# Altium PCB Speedometer_Tech.PcbDoc (part 1 of 4)
Units mm, origin at the board's own origin, x right, y up, seen from the top; angles counter-clockwise.
Board outline 309.2 x 103.7 mm, 4 copper layers (Top Layer, MidLayer1, MidLayer2, Bottom Layer), stack 0.603 mm thick; 246 components, 310 nets, 1253 pads, 701 vias.
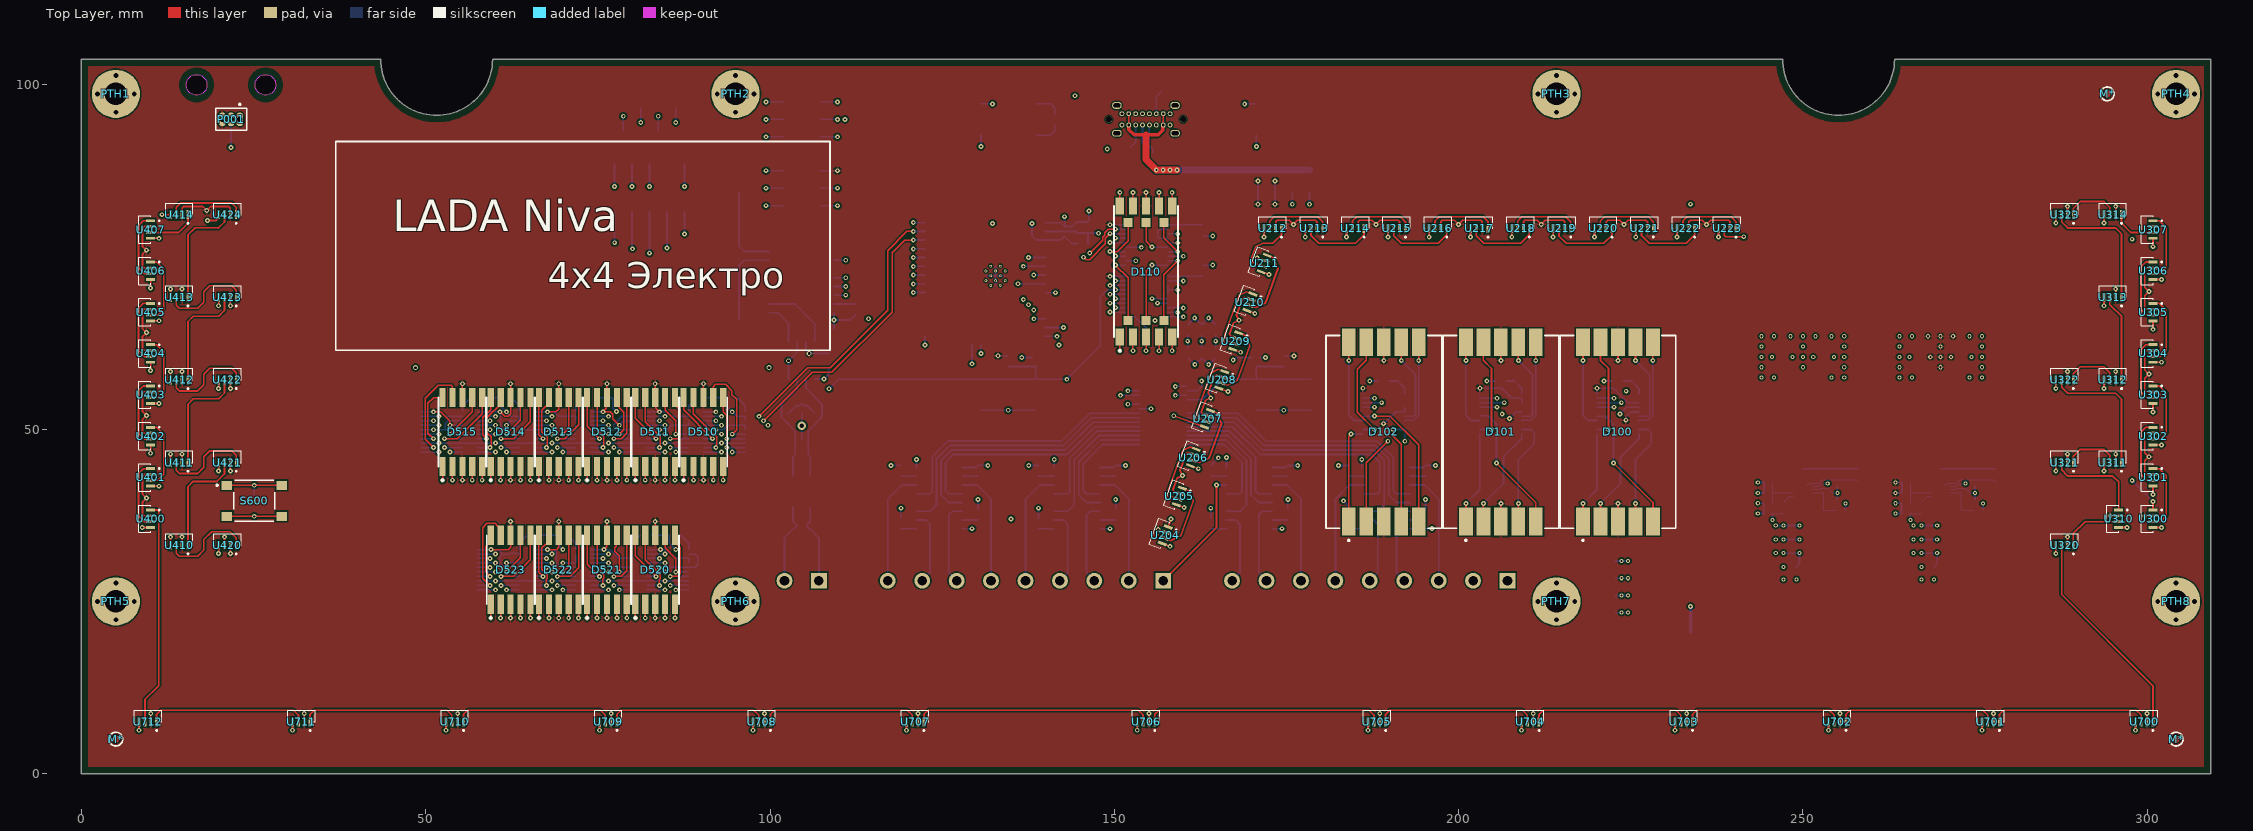
[diagram p0: Top Layer view]
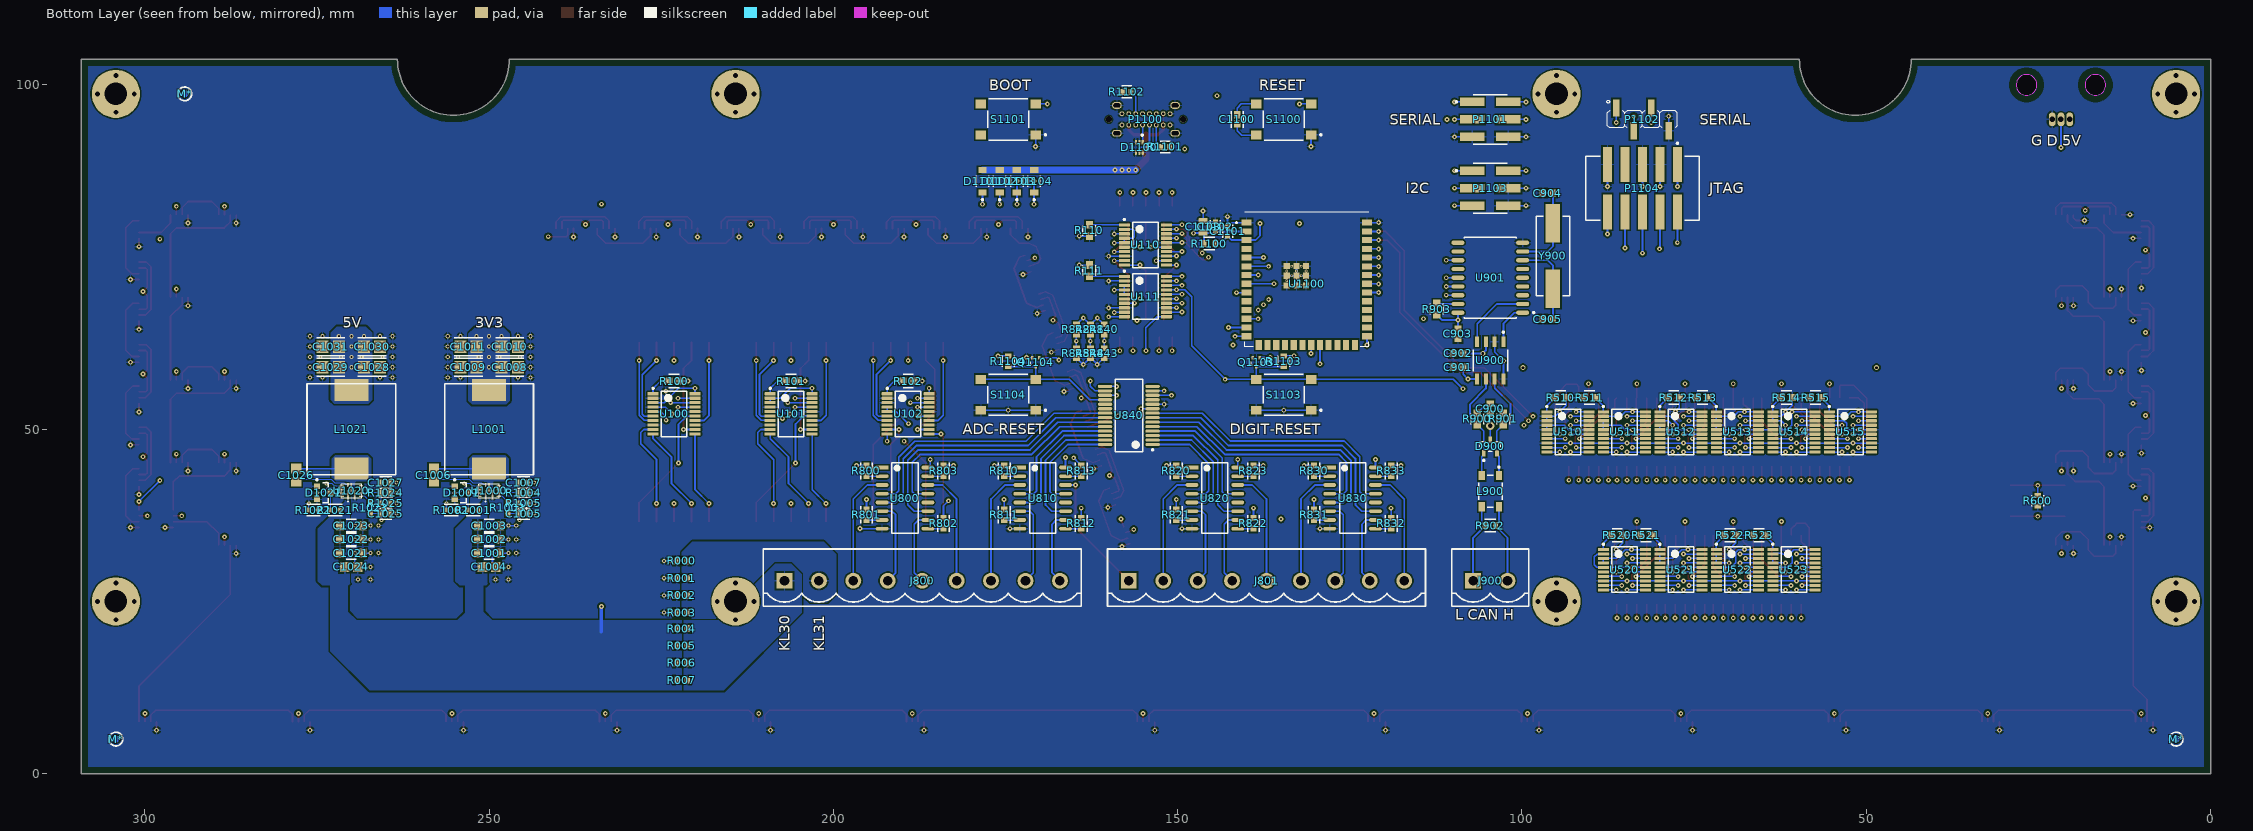
[diagram p1: Bottom Layer view, seen from below]
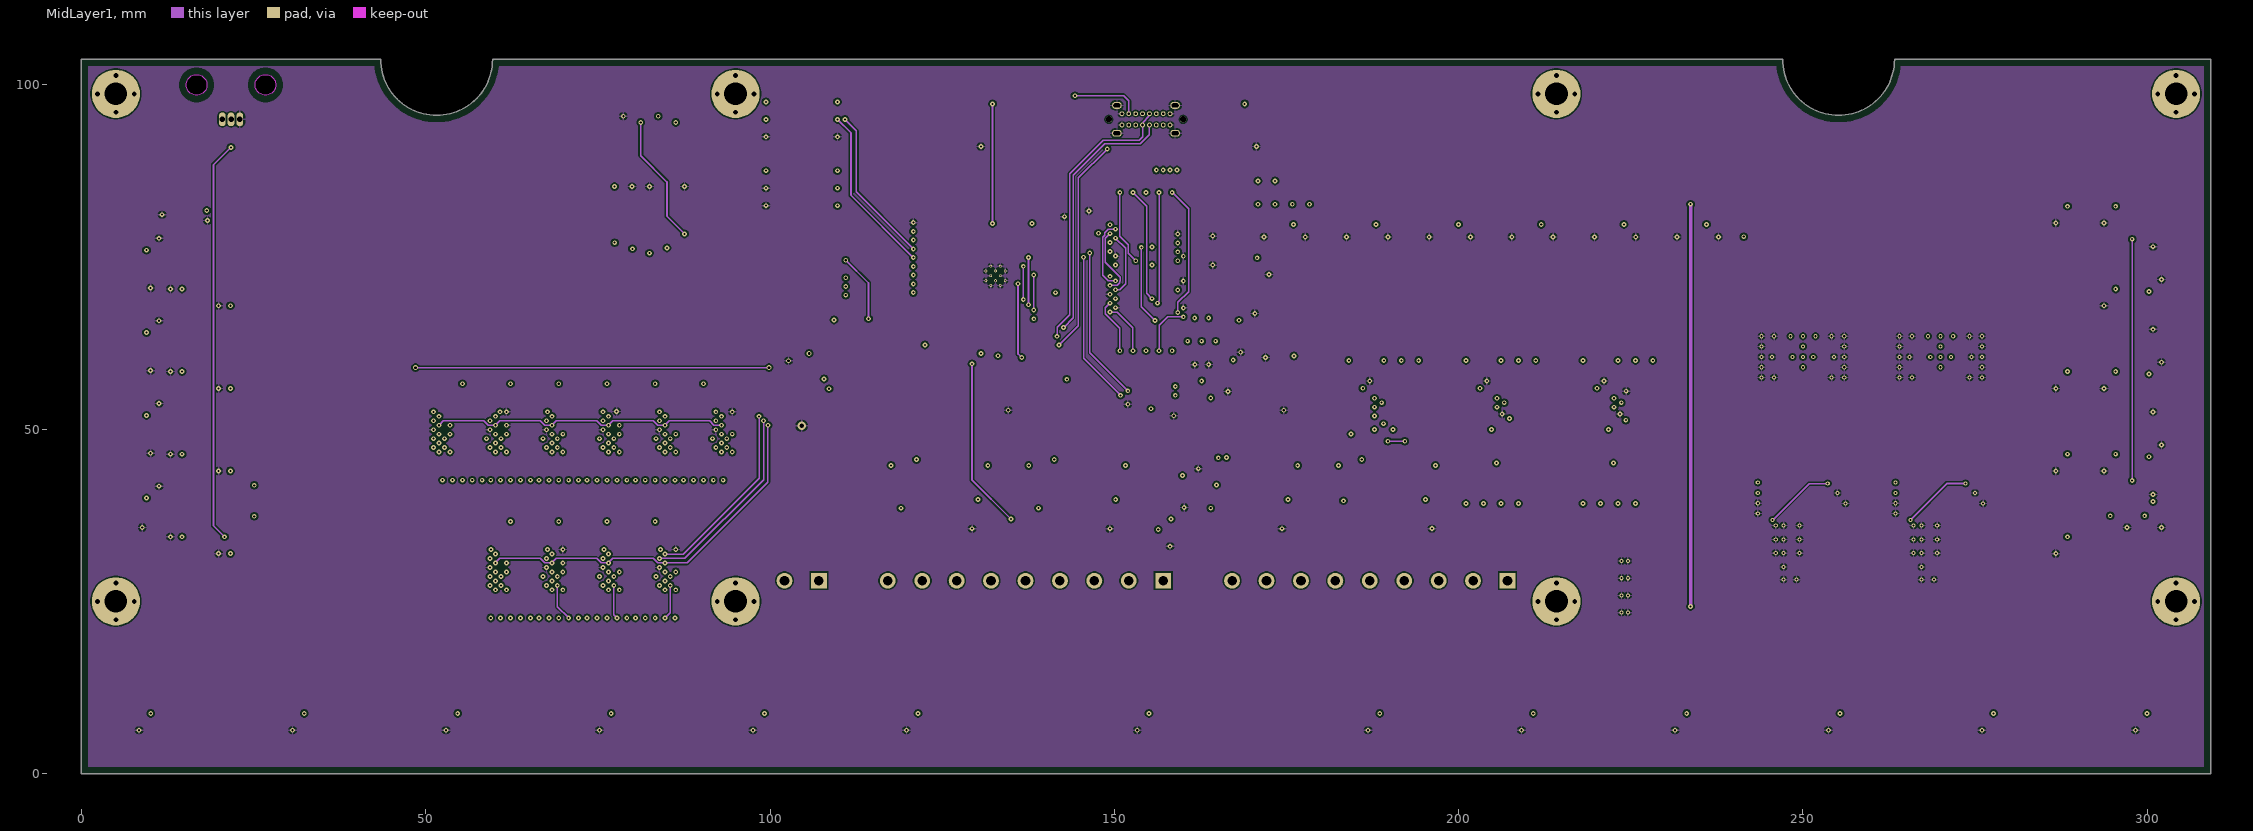
[diagram p2: MidLayer1]
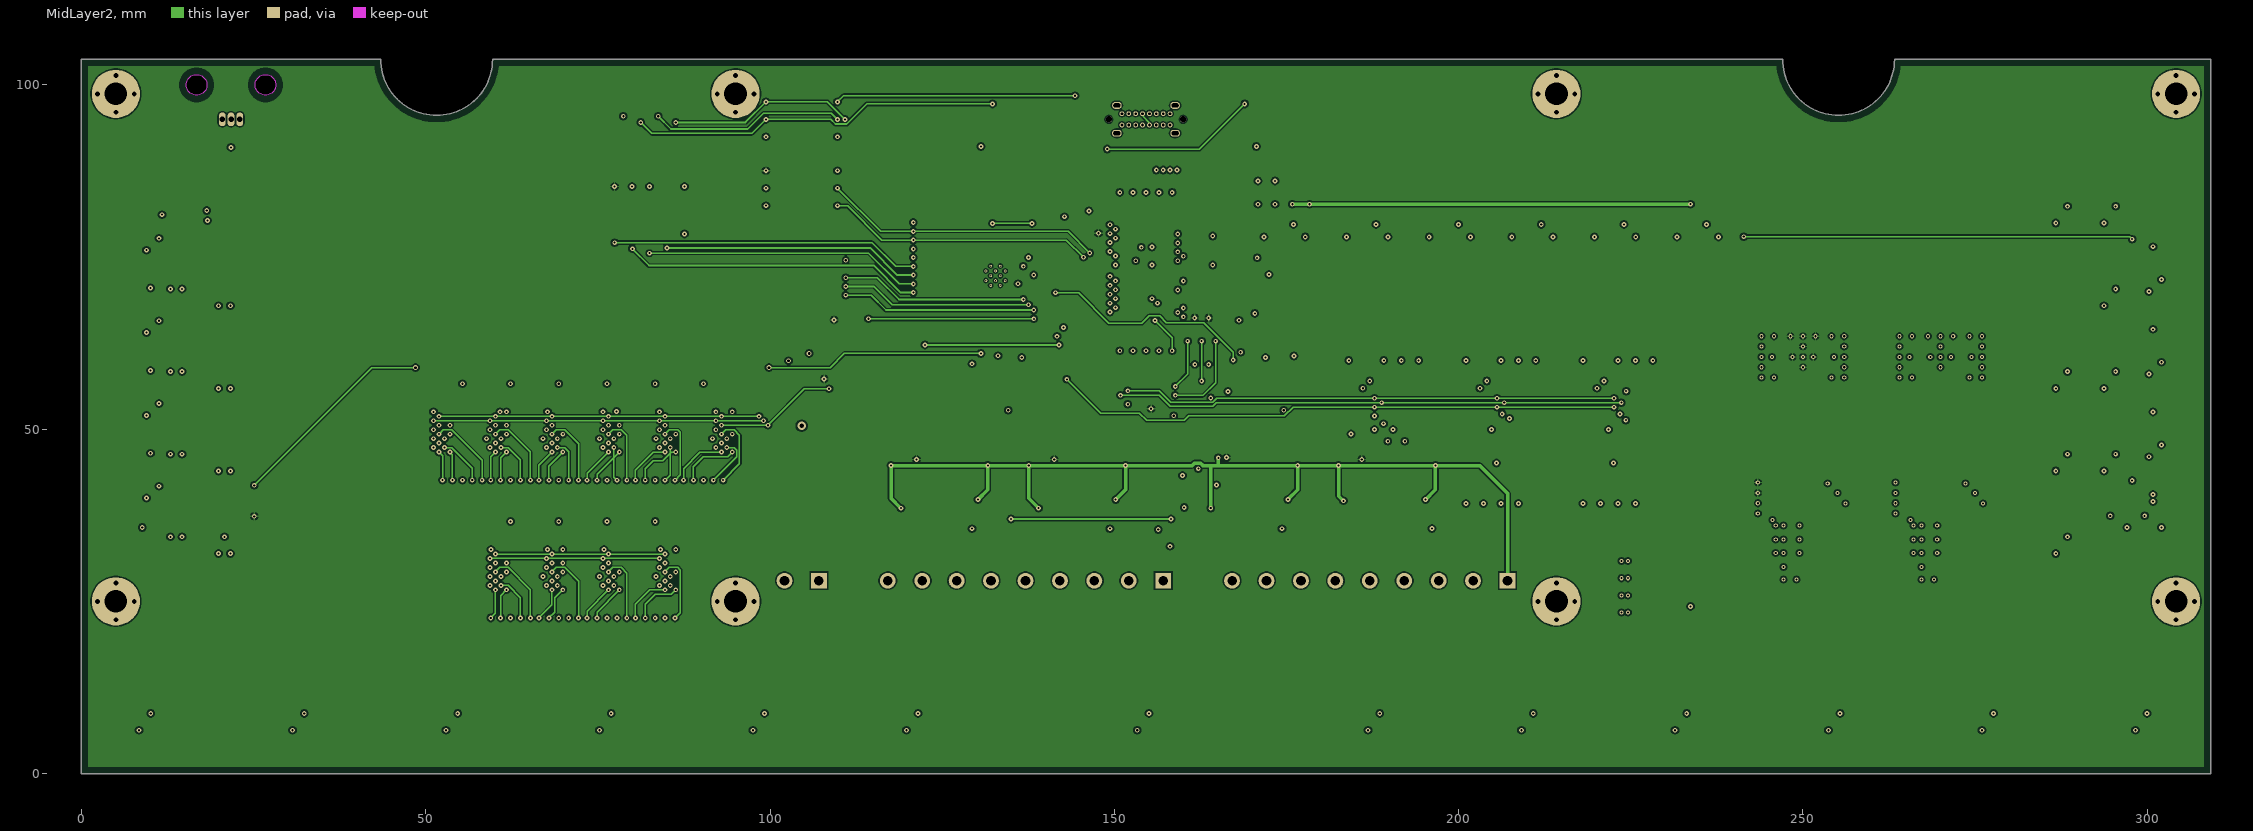
[diagram p3: MidLayer2]
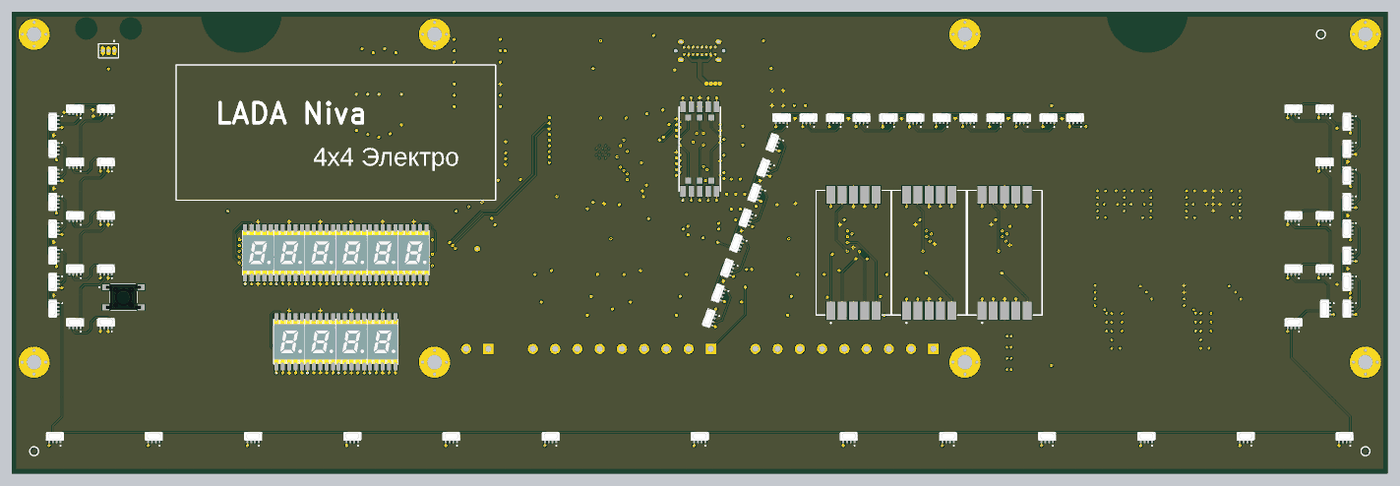
[diagram p6: 3D render of the assembled board from above, using the file's embedded part models]
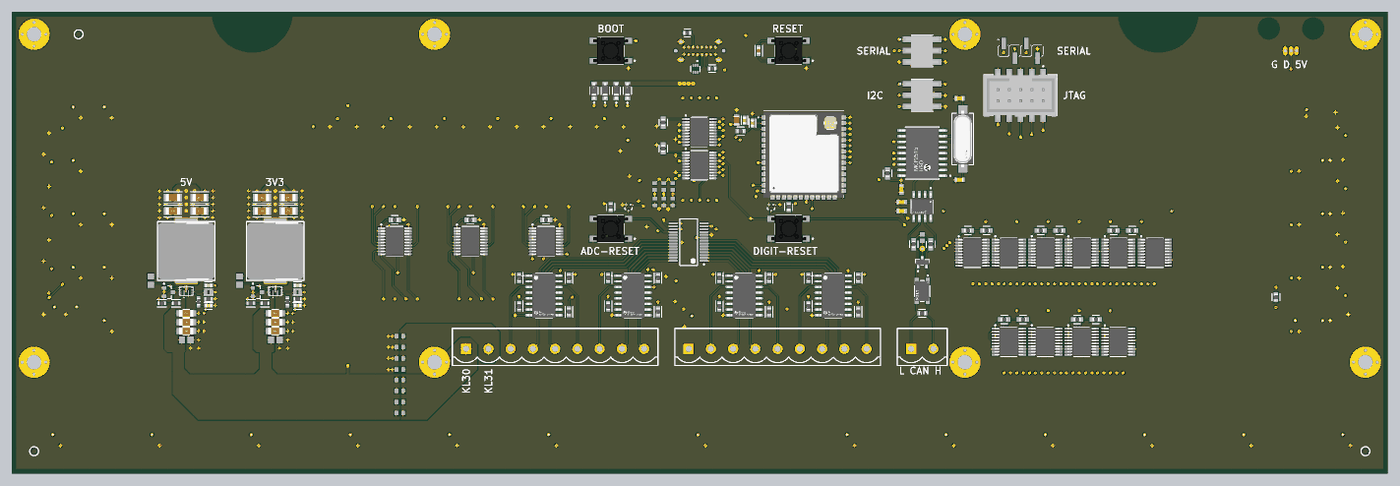
[diagram p7: 3D render of the assembled board from below, using the file's embedded part models]

## Layer stack, top to bottom
Top Solder: solder mask 0.0102, Solder Resist, Dk 3.5
Top Layer: signal copper 0.0356
Dielectric 2: prepreg 0.0711, PP-006, Dk 4.1
MidLayer1: signal copper 0.035
Dielectric 1: dielectric 0.32, FR-4, Dk 4.8
MidLayer2: signal copper 0.035
Dielectric 3: prepreg 0.0711, PP-006, Dk 4.1
Bottom Layer: signal copper 0.0356
Bottom Solder: solder mask 0.0102, Solder Resist, Dk 3.5

## Board outline
0,0 0,103.7 43.45,103.7 ccw(c51.575,103.7) 59.7,103.7 247.05,103.7 ccw(c255.175,103.7) 263.3,103.7 309.2,103.7 309.2,0
cut-out: 26.725,98.5 cw(c26.725,100) 25.225,100 cw(c26.725,100) 26.725,101.5 cw(c26.725,100) 28.225,100 cw(c26.725,100)
cut-out: 16.725,98.5 cw(c16.725,100) 15.225,100 cw(c16.725,100) 16.725,101.5 cw(c16.725,100) 18.225,100 cw(c16.725,100)

## Design rules (kind name [scope] priority, off if disabled: settings)
AssemblyTestPointUsage [All] p1: isadvanced=TRUE
AssemblyTestpoint [All] p1: isadvanced=TRUE testpointundercomponent=TRUE minsize=1.016 maxsize=2.54 preferedsize=1.524 minholesize=0 maxholesize=1.016 preferedholesize=0.813 testpointgrid=0.025 usegrid=TRUE gridtolerance=0 allowsidetop=TRUE allowsidebottom=TRUE
BoardOutlineClearance [All] p1: gap=1 ignorepadtopadclearanceinfootprint=FALSE
Clearance Clearance_1 [(ExistsOnLayer('MidLayer1') Or ExistsOnLayer('MidLayer2')) vs (ExistsOnLayer('MidLayer1') Or ExistsOnLayer('MidLayer2'))] p1: gap=0.2 ignorepadtopadclearanceinfootprint=TRUE except(0.254: Via-Via Via-Fill Via-Poly Via-Region Fill-Fill Fill-Poly Fill-Region Poly-Poly Poly-Region Region-Region) sourcerule=45 cellrowname=All cellrowtype=0 cellcolname=All cellcoltype=0 innerlayers=TRUE
Clearance Clearance_2 [(ExistsOnLayer('Top Layer') Or ExistsOnLayer('Bottom Layer')) vs (ExistsOnLayer('Top Layer') Or ExistsOnLayer('Bottom Layer'))] p2: gap=0.2 ignorepadtopadclearanceinfootprint=TRUE except(0.254: Via-Via Via-Fill Via-Poly Via-Region Fill-Fill Fill-Poly Fill-Region Poly-Poly Poly-Region Region-Region) sourcerule=45 cellrowname=All cellrowtype=0 cellcolname=All cellcoltype=0 outerlayers=TRUE
Clearance [All] p3: gap=0.2 ignorepadtopadclearanceinfootprint=TRUE except(0.254: Via-Via Via-Fill Via-Poly Via-Region Fill-Fill Fill-Poly Fill-Region Poly-Poly Poly-Region Region-Region) ismatrix=TRUE
ComponentClearance [All] p1: isadvanced=TRUE gap=0.254 collisioncheckmode=3 verticalgap=0.254 showdistances=FALSE
FabricationTestPointUsage [All] p1: isadvanced=TRUE valid=0 allowmultiple=FALSE
FabricationTestpoint [All] p1: isadvanced=TRUE side=3 testpointundercomponent=TRUE minsize=1.016 maxsize=2.54 preferedsize=1.524 minholesize=0 maxholesize=1.016 preferedholesize=0.813 testpointgrid=0.025 allowsidetop=TRUE allowsidebottom=TRUE usegrid=TRUE gridtolerance=0
FanoutControl Fanout_BGA [IsBGA] p1: isadvanced=TRUE bgadir=Out bgaviamode=Centered fanoutstyle=Auto fanoutdirection=Alternating viagrid=0.025 // Fanout_BGA (Default Rule)
FanoutControl Fanout_LCC [IsLCC] p2: isadvanced=TRUE bgadir=Out bgaviamode=Centered fanoutstyle=Auto fanoutdirection=Alternating viagrid=0.025 // Fanout_LCC (Default Rule)
FanoutControl Fanout_SOIC [IsSOIC] p3: isadvanced=TRUE bgadir=Out bgaviamode=Centered fanoutstyle=Auto fanoutdirection=Alternating viagrid=0.025 // Fanout_SOIC (Default Rule)
FanoutControl Fanout_Small [(CompPinCount < 5)] p4: isadvanced=TRUE bgadir=Out bgaviamode=Centered fanoutstyle=Auto fanoutdirection=OutThenIn viagrid=0.025 // Fanout_Small (Default Rule)
FanoutControl Fanout_Default [All] p5: isadvanced=TRUE bgadir=Out bgaviamode=Centered fanoutstyle=Auto fanoutdirection=Alternating viagrid=0.025 // Fanout_Default (Default Rule)
Height [All] p1: isadvanced=TRUE minheight=0 maxheight=25.4 prefheight=12.7
HoleSize [All] p1: isadvanced=TRUE absolutevalues=TRUE maxlimit=2.54 minlimit=0.025 maxpercent=80.000 minpercent=20.000
HoleToHoleClearance [All] p1: isadvanced=TRUE gap=0.254 allowstackedmicrovias=TRUE
LayerPairs [All] p1: isadvanced=TRUE enforce=TRUE
MinimumSolderMaskSliver [All] p1: isadvanced=TRUE minsoldermaskwidth=0.15
NetAntennae [All] p1: isadvanced=TRUE netantennaetolerance=0
PasteMaskExpansion [All] p1: isadvanced=TRUE expansion=0
PlaneClearance [All] p1: isadvanced=TRUE clearance=0.508
PlaneConnect [All] p1: isadvanced=TRUE planeconnectstyle=Relief reliefexpansion=0.508 reliefentries=4 reliefconductorwidth=0.254 reliefairgap=0.254
PolygonConnect PolygonDirectConnect [IsNamedPolygon('NETC1006_1_L04_P025') Or IsNamedPolygon('NETC1026_1_L04_P026') Or  IsNamedPolygon('3V3_L04_P006') Or  IsNamedPolygon('5V_L04_P007')] p1: connectstyle=Direct reliefconductorwidth=0.254 reliefentries=4 polygonreliefangle="90 Angle" airgapwidth=0.254
PolygonConnect [All] p2: connectstyle=Relief reliefconductorwidth=0.254 reliefentries=4 polygonreliefangle="90 Angle" airgapwidth=0.254
RoutingCorners [All] p1: isadvanced=TRUE cornerstyle=45-Degree minsetback=2.54 maxsetback=2.54
RoutingPriority [All] p1: isadvanced=TRUE routingpriority=0
RoutingVias [All] p1: holewidth=0.711 width=1.27 viastyle="Through Hole" minholewidth=0.711 minwidth=1.27 maxholewidth=0.711 maxwidth=1.27
ShortCircuit [All] p1: isadvanced=TRUE allowed=FALSE
SilkToSilkClearance [All] p1: isadvanced=TRUE silktosilkclearance=0.254
SilkToSolderMaskClearance [IsPad] p1: isadvanced=TRUE minsilkscreentomaskgap=0.254 clearancetoexposedcopper=TRUE
SolderMaskExpansion [All] p1: isadvanced=TRUE expansion=0.102 istentingtop=FALSE
SupplyNets "Schematic Supply Nets_13" [InNet('KL30')] p1: voltage=0.000
SupplyNets "Schematic Supply Nets_12" [InNet('GND')] p2: voltage=0.000
SupplyNets "Schematic Supply Nets_11" [InNet('3V3')] p3: voltage=0.000
SupplyNets "Schematic Supply Nets_10" [InNet('5V')] p4: voltage=0.000
SupplyNets "Schematic Supply Nets_9" [InNet('KL31')] p5: voltage=0.000
SupplyNets "Schematic Supply Nets_8" [InNet('VBUS')] p6: voltage=0.000
SupplyNets "Schematic Supply Nets_7" [InNet('KL30i')] p7: voltage=0.000
UnRoutedNet [All] p1: isadvanced=TRUE
UnpouredPolygon [All] p1: isadvanced=TRUE
Width [All] p1: maxlimit=4 minlimit=0.15 preferedwidth=0.2
4 further rules are at their usual default settings.

## Classes and differential pairs
component class Designator: U204 U205 U206 U207 U208 U209 U210 U211 U212 U213 U214 U215 U216 U217 U218 U219 U220 U221 U222 U223
component class Designator: J800 J801 R800 R801 R802 R803 R810 R811 R812 R813 R820 R821 R822 R823 R830 R831 R832 R833 R840 R841 R842 R843 R844 R845 U800 U810 U820 U830 U840
component class 00_Overview: M* P001 PTH1 PTH2 PTH3 PTH4 PTH5 PTH6 PTH7 PTH8 R000 R001 R002 R003 R004 R005 R006 R007
component class Designator: U700 U701 U702 U703 U704 U705 U706 U707 U708 U709 U710 U711 U712
component class Designator: U400 U401 U402 U403 U404 U405 U406 U407 U410 U411 U412 U413 U414 U420 U421 U422 U423 U424
component class Designator: U300 U301 U302 U303 U304 U305 U306 U307 U310 U311 U312 U313 U314 U320 U321 U322 U323
component class Designator: C0101 C900 C901 C902 C903 C904 C905 C01101 C01102 C01103 C01104 C01105 D900 J900 L0101 L900 Q0101 R0105 R0106 R900 R901 R902 R903 R01101 U900 U901 Y900
component class Designator: D100 D101 D102 D110 R100 R101 R102 R110 R111 U100 U101 U102 U110 U111
component class Designator: C1100 C1101 C1102 C1103 D1100 D1101 D1102 D1103 D1104 P1100 P1101 P1102 P1103 P1104 Q1103 Q1104 R1100 R1101 R1102 R1103 R1104 S1100 S1101 S1103 S1104 U1100
component class Designator: D510 D511 D512 D513 D514 D515 D520 D521 D522 D523 R510 R511 R512 R513 R514 R515 R520 R521 R522 R523 U510 U511 U512 U513 U514 U515 U520 U521 U522 U523

## Components (designator, comment, footprint, x,y, rotation, side; value= is the part's Value field where it differs from the comment)
C900 "GRM188R71H472KA01D" CAPC1608X90X35ML10T15 104.6,53 r270 bottom
C901 "GRM188R71H104KA93D" CAPC1608X90X35ML10T15 109.25,59 r180 bottom
C902 "GRM188R71H104KA93D" CAPC1608X90X35ML10T15 109.25,61 r180 bottom
C903 "GRM188R71H104KA93D" CAPC1608X90X35ML10T15 109.3,63.881 r90 bottom
C904 "GRM1885C1H220JA01D" CAPC1608X90X35ML10T15 96.225,84.302 r180 bottom
C905 "GRM1885C1H220JA01D" CAPC1608X90X35ML10T15 96.225,66 r180 bottom
C1001 "47uF/25V" FP-C3216-160-0_2-MFG 250,32 r180 bottom
C1002 "47uF/25V" FP-C3216-160-0_2-MFG 250,34 r180 bottom
C1003 "47uF/25V" FP-C3216-160-0_2-MFG 250,36 r180 bottom
C1004 "0.1uF/50V" CAPC2013X135X45ML10T25 250,30 r0 bottom
C1005 "1uF/10V" FP-C0603-CG-MFG 245,37.75 r180 bottom
C1006 "0.1uF/50V" CAPC2013X135X45ML10T25 258,43.335 r270 bottom
C1007 "22pF/16V" FP-C0603C-CF-MFG 245,42.25 r0 bottom value="22 pF"
C1008 "22uF/35V" FP-C3216-160-0_2-IPC_B 247,59 r180 bottom
C1009 "22uF/35V" FP-C3216-160-0_2-IPC_B 253,59 r0 bottom
C1010 "22uF/35V" FP-C3216-160-0_2-IPC_B 247,62 r180 bottom
C1011 "22uF/35V" FP-C3216-160-0_2-IPC_B 253,62 r0 bottom
C1021 "47uF/25V" FP-C3216-160-0_2-MFG 270,32 r180 bottom
C1022 "47uF/25V" FP-C3216-160-0_2-MFG 270,34 r180 bottom
C1023 "47uF/25V" FP-C3216-160-0_2-MFG 270,36 r180 bottom
C1024 "0.1uF/50V" CAPC2013X135X45ML10T25 270,30 r0 bottom
C1025 "1uF/10V" FP-C0603-CG-MFG 265,37.75 r180 bottom
C1026 "0.1uF/50V" CAPC2013X135X45ML10T25 278,43.335 r270 bottom
C1027 "22pF/16V" FP-C0603C-CF-MFG 265,42.25 r0 bottom value="22 pF"
C1028 "22uF/35V" FP-C3216-160-0_2-IPC_B 267,59 r180 bottom
C1029 "22uF/35V" FP-C3216-160-0_2-IPC_B 273,59 r0 bottom
C1030 "22uF/35V" FP-C3216-160-0_2-IPC_B 267,62 r180 bottom
C1031 "22uF/35V" FP-C3216-160-0_2-IPC_B 273,62 r0 bottom
C1100 "GMK107BJ104KAHT" FP-0603-L_1_6_0_1-W_0_8_0-IPC_B 141.351,95 r270 bottom
C1101 "1uF" FP-CGA3E-0_3-0_1-MFG 142.748,78.74 r90 bottom
C1102 "1uF" FP-CGA3E-0_3-0_1-MFG 144.526,79.375 r90 bottom
C1103 "Capacitor 22µF +/-40% 16V 0805" CAPC0805(2012)145_L 146.304,79.375 r270 bottom value=22µF
D100 "28mm 7-Segment" GS8011AR-G 223.133,49.6 r0 top locked
D101 "28mm 7-Segment" GS8011AR-G 206.133,49.6 r0 top locked
D102 "28mm 7-Segment" GS8011AR-G 189.133,49.6 r0 top locked
D110 "19mm 14-Segment, Alphanummerical" GS4011AG-G 154.6,72.898 r0 top
D510 "10mm 7-Segment" GS2011AG-G 90.32,49.6 r0 top locked
D511 "10mm 7-Segment" GS2011AG-G 83.32,49.6 r0 top locked
D512 "10mm 7-Segment" GS2011AG-G 76.32,49.6 r0 top locked
D513 "10mm 7-Segment" GS2011AG-G 69.32,49.6 r0 top locked
D514 "10mm 7-Segment" GS2011AG-G 62.32,49.6 r0 top locked
D515 "10mm 7-Segment" GS2011AG-G 55.32,49.6 r0 top locked
D520 "10mm 7-Segment" GS2011AG-G 83.32,29.6 r0 top locked
D521 "10mm 7-Segment" GS2011AG-G 76.32,29.6 r0 top locked
D522 "10mm 7-Segment" GS2011AG-G 69.32,29.6 r0 top locked
D523 "10mm 7-Segment" GS2011AG-G 62.32,29.6 r0 top locked
D900 "ESDONCAN1LT3G" FP-318-MFG 104.6,47.5 r90 bottom
D1001 "MMBZ5231BLT1G" ONSC-SOT-23-3-318-08_V 254,40.75 r180 bottom
D1021 "MMBZ5231BLT1G" ONSC-SOT-23-3-318-08_V 274,40.75 r180 bottom
D1100 "TPD2E1B06DRLR" FP-DRL0006A-MFG 155.575,90.932 r270 bottom
D1101 "SBR80520LT1G" FP-425-04-MFG 178.35,86 r90 bottom
D1102 "SBR80520LT1G" FP-425-04-MFG 175.85,86 r90 bottom
D1103 "SBR80520LT1G" FP-425-04-MFG 173.35,86 r90 bottom
D1104 "SBR80520LT1G" FP-425-04-MFG 170.85,86 r90 bottom
J800 "CTB9302/9" CTB9302-9 187.1,28 r180 bottom
J801 "CTB9302/9" CTB9302-9 137.1,28 r180 bottom
J900 "CTB9302/2" CTB9302-2 104.6,28 r180 bottom
L900 "ACT45B-101-2P-TL003" FP-ACT45B-MFG 104.6,41 r270 bottom value=100uH
L1001 "IHLP5050CEER1R5M01" IHLP5050CEER1R5M01 250,50 r90 bottom
L1021 "IHLP5050CEER1R5M01" IHLP5050CEER1R5M01 270,50 r90 bottom
M* "Passermarke" Passermarke-Footprint-1 5,5 r180 bottom
M* "Passermarke" Passermarke-Footprint-1 304.2,5 r0 top
M* "Passermarke" Passermarke-Footprint-1 304.2,5 r180 bottom
M* "Passermarke" Passermarke-Footprint-1 5,5 r0 top
M* "Passermarke" Passermarke-Footprint-1 294.2,98.7 r180 bottom
M* "Passermarke" Passermarke-Footprint-1 294.2,98.7 r0 top
P001 "3P-SMD/THT" 3P-SMD/THT 21.725,95 r90 top
P1100 "TYPEC-300D-BCP16H100" TYPEC-300D-BCP16H100-Footprint-1 154.6,95 r0 bottom
P1101 "5-146130-2" TECO-5-146130-2_V 104.6,95 r270 bottom
P1102 "M20-8770442R" HARWIN_M20-8770442R 82.5,95 r180 bottom
P1103 "5-146130-2" TECO-5-146130-2_V 104.6,85 r270 bottom
P1104 "HTSS-105-01-L-DV" SMTC-HTSS-105-01-X-DV 82.5,85 r0 bottom
PTH1 "PTH-M4D7X7" PTH-M4D7X7-Footprint-1 5,98.7 r0 top
PTH2 "PTH-M4D7X7" PTH-M4D7X7-Footprint-1 95,98.7 r0 top
PTH3 "PTH-M4D7X7" PTH-M4D7X7-Footprint-1 214.2,98.7 r0 top
PTH4 "PTH-M4D7X7" PTH-M4D7X7-Footprint-1 304.2,98.7 r0 top
PTH5 "PTH-M4D7X7" PTH-M4D7X7-Footprint-1 5,25 r0 top
PTH6 "PTH-M4D7X7" PTH-M4D7X7-Footprint-1 95,25 r0 top
PTH7 "PTH-M4D7X7" PTH-M4D7X7-Footprint-1 214.2,25 r0 top
PTH8 "PTH-M4D7X7" PTH-M4D7X7-Footprint-1 304.2,25 r0 top
Q1103 "DTC123JET1G" ONSC-SC-75-3-463-01_V 138.575,59.75 r270 bottom
Q1104 "DTC123JET1G" ONSC-SC-75-3-463-01_V 170.625,59.75 r270 bottom
R000 "RC0603JR-070RL" RESC1608X55X25ML10T15 222,30.861 r0 bottom
R001 "RC0603JR-070RL" RESC1608X55X25ML10T15 222,28.361 r0 bottom
R002 "RC0603JR-070RL" RESC1608X55X25ML10T15 222,25.861 r0 bottom
R003 "RC0603JR-070RL" RESC1608X55X25ML10T15 222,23.361 r0 bottom
R004 "RC0603JR-070RL" RESC1608X55X25ML10T15 222,21.052 r0 bottom
R005 "RC0603JR-070RL" RESC1608X55X25ML10T15 222,18.552 r0 bottom
R006 "RC0603JR-070RL" RESC1608X55X25ML10T15 222,16.052 r0 bottom
R007 "RC0603JR-070RL" RESC1608X55X25ML10T15 222,13.552 r0 bottom
R100 "680Ω" FP-CRCW0603-e3-IPC_A 223.133,57 r180 bottom
R101 "680Ω" FP-CRCW0603-e3-IPC_A 206.133,57 r180 bottom
R102 "680Ω" FP-CRCW0603-e3-IPC_A 189.133,57 r180 bottom
R110 "680Ω" FP-CRCW0603-e3-IPC_A 162.814,78.867 r270 bottom
R111 "680Ω" FP-CRCW0603-e3-IPC_A 162.814,73.025 r90 bottom
R510 "680Ω" FP-CRCW0603-e3-IPC_A 94.37,54.6 r180 bottom
R511 "680Ω" FP-CRCW0603-e3-IPC_A 90.17,54.6 r0 bottom
R512 "680Ω" FP-CRCW0603-e3-IPC_A 77.97,54.6 r180 bottom
R513 "680Ω" FP-CRCW0603-e3-IPC_A 73.77,54.6 r0 bottom
R514 "680Ω" FP-CRCW0603-e3-IPC_A 61.57,54.6 r180 bottom
R515 "680Ω" FP-CRCW0603-e3-IPC_A 57.37,54.6 r0 bottom
R520 "680Ω" FP-CRCW0603-e3-IPC_A 86.17,34.6 r180 bottom
R521 "680Ω" FP-CRCW0603-e3-IPC_A 81.97,34.6 r0 bottom
R522 "680Ω" FP-CRCW0603-e3-IPC_A 69.77,34.6 r180 bottom
R523 "680Ω" FP-CRCW0603-e3-IPC_A 65.57,34.6 r0 bottom
R600 "1kΩ" FP-CRCW0603-e3-MFG 25.1,39.6 r90 bottom
R800 "AC0603FR-071KL" FP-AC0603-IPC_B 195.2,43.952 r270 bottom
R801 "AC0603FR-071KL" FP-AC0603-IPC_B 195.2,37.582 r270 bottom
R802 "AC0603FR-071KL" FP-AC0603-IPC_B 184,36.332 r270 bottom
R803 "AC0603FR-071KL" FP-AC0603-IPC_B 184,43.952 r270 bottom
R810 "AC0603FR-071KL" FP-AC0603-IPC_B 175.2,43.952 r270 bottom
R811 "AC0603FR-071KL" FP-AC0603-IPC_B 175.2,37.582 r270 bottom
R812 "AC0603FR-071KL" FP-AC0603-IPC_B 164,36.332 r270 bottom
R813 "AC0603FR-071KL" FP-AC0603-IPC_B 164,43.952 r270 bottom
R820 "AC0603FR-071KL" FP-AC0603-IPC_B 150.2,43.952 r270 bottom
R821 "AC0603FR-071KL" FP-AC0603-IPC_B 150.2,37.582 r270 bottom
R822 "AC0603FR-071KL" FP-AC0603-IPC_B 139,36.332 r270 bottom
R823 "AC0603FR-071KL" FP-AC0603-IPC_B 139,43.952 r270 bottom
R830 "AC0603FR-071KL" FP-AC0603-IPC_B 130.2,43.952 r270 bottom
R831 "AC0603FR-071KL" FP-AC0603-IPC_B 130.2,37.582 r270 bottom
R832 "AC0603FR-071KL" FP-AC0603-IPC_B 119,36.332 r270 bottom
R833 "AC0603FR-071KL" FP-AC0603-IPC_B 119,43.952 r270 bottom
R840 "RC0603JR-070RL" RESC1608X55X25ML10T15 160.655,64.485 r90 bottom
R841 "RC0603JR-070RL" RESC1608X55X25ML10T15 162.687,64.485 r90 bottom
R842 "RC0603JR-070RL" RESC1608X55X25ML10T15 164.719,64.485 r90 bottom
R843 "RC0603JR-070RL" RESC1608X55X25ML10T15 160.655,61.025 r90 bottom
R844 "RC0603JR-070RL" RESC1608X55X25ML10T15 162.687,61.025 r90 bottom
R845 "RC0603JR-070RL" RESC1608X55X25ML10T15 164.711,61.025 r90 bottom
R900 "CRCW06034K70FKEA" FP-CRCW0603-e3-IPC_A 106.5,51.5 r270 bottom
R901 "CRCW06034K70FKEA" FP-CRCW0603-e3-IPC_A 102.7,51.5 r90 bottom
R902 "CRCW0603120RFKEA" FP-CRCW0603-e3-MFG 104.6,36 r0 bottom
R903 "CRCW06034K70FKEA" FP-CRCW0603-e3-IPC_A 112.395,67.437 r270 bottom
R1001 "20k/1%" FP-RC0603-0_55-IPC_C 252.323,38.25 r180 bottom
R1002 "20k/1%" FP-RC0603-0_55-IPC_C 255.5,38.25 r180 bottom
R1003 "RC0603FR-07100KL" FP-RC0603-0_55-MFG 247.269,38.6 r90 bottom
R1004 "91k" RESC1609X50X30NL10T20 245,40.75 r180 bottom
R1005 "20K/1%" FP-RC0603-0_55-IPC_C 245,39.25 r0 bottom
R1021 "20k/1%" FP-RC0603-0_55-IPC_C 272.323,38.25 r180 bottom
R1022 "20k/1%" FP-RC0603-0_55-IPC_C 275.5,38.25 r180 bottom
R1023 "RC0603FR-07100KL" FP-RC0603-0_55-MFG 267.269,38.6 r90 bottom
R1024 "150K" RESC1608X55X30NL15T15 265,40.75 r180 bottom
R1025 "20K/1%" FP-RC0603-0_55-IPC_C 265,39.25 r0 bottom
R1100 "1kΩ" FP-CRCW0603-e3-MFG 145.415,76.962 r180 bottom
R1101 "CRCW06035K10FKEA" FP-CRCW0603-e3-IPC_C 151.8,91 r180 bottom
R1102 "CRCW06035K10FKEA" FP-CRCW0603-e3-IPC_C 157.4,99 r0 bottom
R1103 "1kΩ" FP-CRCW0603-e3-MFG 134.6,59.9 r90 bottom
R1104 "1kΩ" FP-CRCW0603-e3-MFG 174.6,59.9 r90 bottom
S600 "" FP-PTS645SM43SMTR92LFS-MFG 25.1,39.6 r0 top locked
S1100 "" FP-PTS645SM43SMTR92LFS-MFG 134.6,95 r0 bottom
S1101 "" FP-PTS645SM43SMTR92LFS-MFG 174.6,95 r0 bottom
S1103 "" FP-PTS645SM43SMTR92LFS-MFG 134.6,55 r0 bottom
S1104 "" FP-PTS645SM43SMTR92LFS-MFG 174.6,55 r0 bottom
U100 "TLC59108IPWR" PW0020A_M 223.133,52.225 r180 bottom
U101 "TLC59108IPWR" PW0020A_M 206.133,52.225 r180 bottom
U102 "TLC59108IPWR" PW0020A_M 189.133,52.225 r180 bottom
U110 "TLC59108IPWR" PW0020A_M 154.686,76.755 r180 bottom
U111 "TLC59108IPWR" PW0020A_M 154.686,69.262 r180 bottom
U204 "WS2812B-4020_2" LED_WS2812B-4020 156.584,34.896 r70 top locked
U205 "WS2812B-4020_2" LED_WS2812B-4020 158.636,40.534 r70 top locked
U206 "WS2812B-4020_2" LED_WS2812B-4020 160.688,46.172 r70 top locked
U207 "WS2812B-4020_2" LED_WS2812B-4020 162.74,51.81 r70 top locked
U208 "WS2812B-4020_2" LED_WS2812B-4020 164.792,57.448 r70 top locked
U209 "WS2812B-4020_2" LED_WS2812B-4020 166.844,63.086 r70 top locked
U210 "WS2812B-4020_2" LED_WS2812B-4020 168.896,68.724 r70 top locked
U211 "WS2812B-4020_2" LED_WS2812B-4020 170.948,74.362 r70 top locked
U212 "WS2812B-4020_2" LED_WS2812B-4020 173,80 r0 top locked
U213 "WS2812B-4020_2" LED_WS2812B-4020 179,80 r0 top locked
U214 "WS2812B-4020_2" LED_WS2812B-4020 185,80 r0 top locked
U215 "WS2812B-4020_2" LED_WS2812B-4020 191,80 r0 top locked
U216 "WS2812B-4020_2" LED_WS2812B-4020 197,80 r0 top locked
U217 "WS2812B-4020_2" LED_WS2812B-4020 203,80 r0 top locked
U218 "WS2812B-4020_2" LED_WS2812B-4020 209,80 r0 top locked
U219 "WS2812B-4020_2" LED_WS2812B-4020 215,80 r0 top locked
U220 "WS2812B-4020_2" LED_WS2812B-4020 221,80 r0 top locked
U221 "WS2812B-4020_2" LED_WS2812B-4020 227,80 r0 top locked
U222 "WS2812B-4020_2" LED_WS2812B-4020 233,80 r0 top locked
U223 "WS2812B-4020_2" LED_WS2812B-4020 239,80 r0 top locked
U300 "WS2812B-4020_2" LED_WS2812B-4020 300,37 r90 top locked
U301 "WS2812B-4020_2" LED_WS2812B-4020 300,43 r90 top locked
U302 "WS2812B-4020_2" LED_WS2812B-4020 300,49 r90 top locked
U303 "WS2812B-4020_2" LED_WS2812B-4020 300,55 r90 top locked
U304 "WS2812B-4020_2" LED_WS2812B-4020 300,61 r90 top locked
U305 "WS2812B-4020_2" LED_WS2812B-4020 300,67 r90 top locked
U306 "WS2812B-4020_2" LED_WS2812B-4020 300,73 r90 top locked
U307 "WS2812B-4020_2" LED_WS2812B-4020 300,79 r90 top locked
U310 "WS2812B-4020_2" LED_WS2812B-4020 295,37 r90 top locked
U311 "WS2812B-4020_2" LED_WS2812B-4020 295,46 r0 top locked
U312 "WS2812B-4020_2" LED_WS2812B-4020 295,58 r0 top locked
U313 "WS2812B-4020_2" LED_WS2812B-4020 295,70 r0 top locked
U314 "WS2812B-4020_2" LED_WS2812B-4020 295,82 r0 top locked
U320 "WS2812B-4020_2" LED_WS2812B-4020 288,34 r0 top locked
U321 "WS2812B-4020_2" LED_WS2812B-4020 288,46 r0 top locked
U322 "WS2812B-4020_2" LED_WS2812B-4020 288,58 r0 top locked
U323 "WS2812B-4020_2" LED_WS2812B-4020 288,82 r0 top locked
U400 "WS2812B-4020_2" LED_WS2812B-4020 9.2,37 r90 top locked
U401 "WS2812B-4020_2" LED_WS2812B-4020 9.2,43 r90 top locked
U402 "WS2812B-4020_2" LED_WS2812B-4020 9.2,49 r90 top locked
U403 "WS2812B-4020_2" LED_WS2812B-4020 9.2,55 r90 top locked
U404 "WS2812B-4020_2" LED_WS2812B-4020 9.2,61 r90 top locked
U405 "WS2812B-4020_2" LED_WS2812B-4020 9.2,67 r90 top locked
U406 "WS2812B-4020_2" LED_WS2812B-4020 9.2,73 r90 top locked
U407 "WS2812B-4020_2" LED_WS2812B-4020 9.2,79 r90 top locked
U410 "WS2812B-4020_2" LED_WS2812B-4020 14.2,34 r0 top locked
U411 "WS2812B-4020_2" LED_WS2812B-4020 14.2,46 r0 top locked
U412 "WS2812B-4020_2" LED_WS2812B-4020 14.2,58 r0 top locked
U413 "WS2812B-4020_2" LED_WS2812B-4020 14.2,70 r0 top locked
U414 "WS2812B-4020_2" LED_WS2812B-4020 14.2,82 r0 top locked
U420 "WS2812B-4020_2" LED_WS2812B-4020 21.2,34 r0 top locked
U421 "WS2812B-4020_2" LED_WS2812B-4020 21.2,46 r0 top locked
U422 "WS2812B-4020_2" LED_WS2812B-4020 21.2,58 r0 top locked
U423 "WS2812B-4020_2" LED_WS2812B-4020 21.2,70 r0 top locked
U424 "WS2812B-4020_2" LED_WS2812B-4020 21.2,82 r0 top locked
U510 "TLC59108IPWR" PW0020A_M 93.32,49.6 r180 bottom
U511 "TLC59108IPWR" PW0020A_M 85.12,49.6 r180 bottom
U512 "TLC59108IPWR" PW0020A_M 76.92,49.6 r180 bottom
U513 "TLC59108IPWR" PW0020A_M 68.72,49.6 r180 bottom
U514 "TLC59108IPWR" PW0020A_M 60.52,49.6 r180 bottom
U515 "TLC59108IPWR" PW0020A_M 52.32,49.6 r180 bottom
U520 "TLC59108IPWR" PW0020A_M 85.12,29.6 r180 bottom
U521 "TLC59108IPWR" PW0020A_M 76.92,29.6 r180 bottom
U522 "TLC59108IPWR" PW0020A_M 68.72,29.6 r180 bottom
U523 "TLC59108IPWR" PW0020A_M 60.52,29.6 r180 bottom
U700 "WS2812B-4020_2" LED_WS2812B-4020 299.556,8.35 r0 top locked
U701 "WS2812B-4020_2" LED_WS2812B-4020 277.269,8.35 r0 top locked
U702 "WS2812B-4020_2" LED_WS2812B-4020 254.982,8.35 r0 top locked
U703 "WS2812B-4020_2" LED_WS2812B-4020 232.695,8.35 r0 top locked
U704 "WS2812B-4020_2" LED_WS2812B-4020 210.408,8.35 r0 top locked
U705 "WS2812B-4020_2" LED_WS2812B-4020 188.122,8.35 r0 top locked
U706 "WS2812B-4020_2" LED_WS2812B-4020 154.6,8.35 r0 top locked
U707 "WS2812B-4020_2" LED_WS2812B-4020 121.078,8.35 r0 top locked
U708 "WS2812B-4020_2" LED_WS2812B-4020 98.791,8.35 r0 top locked
U709 "WS2812B-4020_2" LED_WS2812B-4020 76.504,8.35 r0 top locked
U710 "WS2812B-4020_2" LED_WS2812B-4020 54.217,8.35 r0 top locked
U711 "WS2812B-4020_2" LED_WS2812B-4020 31.931,8.35 r0 top locked
U712 "WS2812B-4020_2" LED_WS2812B-4020 9.644,8.35 r0 top locked
U800 "CD40109BQNSR" FP-NS0016A-IPC_C 189.6,40 r180 bottom
U810 "CD40109BQNSR" FP-NS0016A-IPC_C 169.6,40 r180 bottom
U820 "CD40109BQNSR" FP-NS0016A-IPC_C 144.6,40 r180 bottom
U830 "CD40109BQNSR" FP-NS0016A-IPC_C 124.6,40 r180 bottom
U840 "MCP23017-E/SS" SSOP-SS28_N 157.1,52 r0 bottom
U900 "MCP2562FDT-E/SN" FP-C04-057-SN-MFG 104.6,60 r270 bottom
U901 "MCP2515-I/SO" FP-C04-051-MFG 104.6,72 r0 bottom
U1000 "TPS51385" TPS51386 250,41 r90 bottom
U1020 "TPS51385" TPS51386 270,41 r90 bottom
U1100 "ESP32WroomS3" ESP32WroomS3 140,80 r180 bottom
Y900 "ABLS-16.000MHZ-K4T" FP-ABLS-MFG 95.5,75.175 r270 bottom

## Footprints (in the part's own frame and the unit in brackets; to place one, negate y for a bottom-side part, rotate by r counter-clockwise, add the part's x,y. Pads: shape width x height; smd on the part's side, far side on the other; paste and mask are expansions set on the pad)
3P-SMD/THT [mm] "3P Header for external Neopixel"
  oval 2x1 hole 0.8: 1(0,-1.27) 2(0,0) 3(0,1.27)
  silkscreen extent -1.6,-2.25 2.31,2.25, body extent -0.23,-1.5 0.23,1.5
CAPC0805(2012)145_L [mm] "Chip Capacitor, Body 2.0x1.2mm, Height 1.45mm, IPC High Density"
  rrect25% 0.76x1.3 smd: 1(-0.9,0) 2(0.89,0)
  silkscreen extent -0.3,-0.55 0.3,0.55, body extent -1,-0.6 1,0.6, height 1.45
CAPC1608X90X35ML10T15 [mm] "Chip Capacitor, 2-Leads, Body 1.60x0.80mm, IPC Low Density"
  rect 0.95x1.05 smd: 1(-0.725,0) 2(0.725,0)
  body extent -0.85,-0.45 0.85,0.45, height 0.9
CAPC2013X135X45ML10T25 [mm] "Chip Capacitor, 2-Leads, Body 2.10x1.35mm, IPC Low Density"
  rect 1.4x1.5 smd: 1(-0.95,0) 2(0.95,0)
  body extent -1.05,-0.67 1.05,0.67, height 1.35
CTB9302-2 [mm]
  rect 2.3x2.3 hole 1.4: 1(-2.5,0)
  round 2.3 hole 1.4: 2(2.5,0)
  silkscreen extent -5.6,-3.7 5.6,4.6, body extent -5.6,-3.68 5.6,4.6, height 12.2
CTB9302-9 [mm]
  rect 2.3x2.3 hole 1.4: 1(-20,0)
  round 2.3 hole 1.4: 2(-15,0) 3(-10,0) 4(-5,0) 5(0,0) 6(5,0) 7(10,0) 8(15,0) 9(20,0)
  silkscreen extent -23.1,-3.7 23.1,4.6, body extent -23.11,-3.68 23.11,4.57, height 12.2
ESP32WroomS3 [mm]
  rect 1.5x0.9 smd: 1(0,0) 2(0,-1.27) 3(0,-2.54) 4(0,-3.81) 5(0,-5.08) 6(0,-6.35) 7(0,-7.62) 8(0,-8.89) 9(0,-10.16) 10(0,-11.43) 11(0,-12.7) 12(0,-13.97) 13(0,-15.24) 14(0,-16.51) 27(17.5,-16.51) 28(17.5,-15.24) 29(17.5,-13.97) 30(17.5,-12.7) 31(17.5,-11.43) 32(17.5,-10.16) 33(17.5,-8.89) 34(17.5,-7.62) 35(17.5,-6.35) 36(17.5,-5.08) 37(17.5,-3.81) 38(17.5,-2.54) 39(17.5,-1.27) 40(17.5,0)
  rect 0.9x1.5 smd: 15(1.765,-17.76) 16(3.035,-17.76) 17(4.305,-17.76) 18(5.575,-17.76) 19(6.845,-17.76) 20(8.115,-17.76) 21(9.385,-17.76) 22(10.655,-17.76) 23(11.925,-17.76) 24(13.195,-17.76) 25(14.465,-17.76) 26(15.735,-17.76)
  rect 0.9x0.9 smd: 41(5.85,-9.12) 41(5.85,-7.72) 41(5.85,-6.32) 41(7.25,-9.12) 41(7.25,-7.72) 41(7.25,-6.32) 41(8.65,-9.12) 41(8.65,-7.72) 41(8.65,-6.32)
  round 0.4 hole 0.2 mask+0: 41(5.85,-8.42) 41(5.85,-7.02) 41(6.55,-9.12) 41(6.55,-7.72) 41(6.55,-6.32) 41(7.25,-8.42) 41(7.25,-7.02) 41(7.95,-9.12) 41(7.95,-7.72) 41(7.95,-6.32) 41(8.65,-8.42) 41(8.65,-7.02)
  silkscreen extent -1.55,-18.01 17.78,1.52, body extent -0.24,-17.98 17.76,1.22, height 3.35
FP-318-MFG [mm]
  rect 0.95x0.56 smd paste+0 mask+0: 1(-0.975,0.95) 2(-0.975,-0.95) 3(0.975,0)
  silkscreen extent -2.15,-1.52 0.7,1.52, body extent -1.2,-1.45 1.2,1.45, height 1.11
FP-425-04-MFG [mil]
  rect 36x48 smd paste+0 mask+0: 1(-64.5,0) 2(64.5,0)
  silkscreen extent -110,-35 32,35, body extent -72,-31 72,31, height 53
FP-0603-L_1_6_0_1-W_0_8_0-IPC_B [mm]
  rect 1.058x0.912 smd paste+0 mask+0: 1(-0.677,0) 2(0.677,0)
  silkscreen extent -1.21,-0.86 1.21,0.86, body extent -0.8,-0.4 0.8,0.4, height 0.9
FP-ABLS-MFG [mm]
  rect 5.6x2.1 smd paste+0 mask+0: 1(-4.75,0) 2(4.75,0)
  silkscreen extent -5.77,-2.42 5.77,2.42, body extent -6.35,-2.35 6.35,2.35, height 4.3
FP-AC0603-IPC_B [mm]
  rect 0.859x0.912 smd paste+0 mask+0: 1(-0.777,0) 2(0.777,0)
  silkscreen extent -1.21,-0.86 1.21,0.86, body extent -0.8,-0.4 0.8,0.4, height 0.55
FP-ACT45B-MFG [mm]
  rect 1.35x0.9 smd paste+0 mask+0: 1(-2.275,1.25) 2(-2.275,-1.25) 3(2.275,-1.25) 4(2.275,1.25)
  silkscreen extent -3.62,-1.7 2.35,1.7, body extent -2.25,-1.6 2.25,1.6, height 3
FP-C04-051-MFG [mm]
  rrect100% 1.9x0.6 smd paste+0 mask+0: 1(-4.7,5.08) 2(-4.7,3.81) 3(-4.7,2.54) 4(-4.7,1.27) 5(-4.7,0) 6(-4.7,-1.27) 7(-4.7,-2.54) 8(-4.7,-3.81) 9(-4.7,-5.08) 10(4.7,-5.08) 11(4.7,-3.81) 12(4.7,-2.54) 13(4.7,-1.27) 14(4.7,0) 15(4.7,1.27) 16(4.7,2.54) 17(4.7,3.81) 18(4.7,5.08)
  silkscreen extent -6.42,-5.87 3.8,5.87, body extent -5.15,-5.77 5.15,5.77, height 2.65
FP-C04-057-SN-MFG [mm]
  rect 1.55x0.6 smd paste+0 mask+0: 1(-2.7,1.905) 2(-2.7,0.635) 3(-2.7,-0.635) 4(-2.7,-1.905) 5(2.7,-1.905) 6(2.7,-0.635) 7(2.7,0.635) 8(2.7,1.905)
  silkscreen extent -4.22,-2.5 1.55,2.5, body extent -3,-2.45 3,2.45, height 1.75
FP-C0603-CG-MFG [mm]
  rect 0.75x0.9 smd paste+0 mask+0: 1(-0.6,0) 2(0.6,0)
  silkscreen extent -0.87,-0.85 0.87,0.85, body extent -0.8,-0.4 0.8,0.4, height 0.9
FP-C0603C-CF-MFG [mm]
  rect 0.75x0.9 smd paste+0 mask+0: 1(-0.6,0) 2(0.6,0)
  silkscreen extent -0.87,-0.85 0.88,0.85, body extent -0.8,-0.4 0.8,0.4, height 0.87
FP-C3216-160-0_2-IPC_B [mm]
  rect 1.754x1.806 smd paste+0 mask+0: 1(-1.176,0) 2(1.176,0)
  silkscreen extent -2.05,-1.3 2.05,1.3, body extent -1.6,-0.8 1.6,0.8, height 1.8
FP-C3216-160-0_2-MFG [mm]
  rect 1.1x1.35 smd paste+0 mask+0: 1(-1.65,0) 2(1.65,0)
  silkscreen extent -0.72,-0.9 0.72,0.9, body extent -1.6,-0.8 1.6,0.8, height 1.8
FP-CGA3E-0_3-0_1-MFG [mm]
  rect 0.7x0.7 smd paste+0 mask+0: 1(-0.7,0) 2(0.7,0)
  silkscreen extent -0.95,-0.72 0.95,0.72, body extent -0.8,-0.4 0.8,0.4, height 1.1
FP-CRCW0603-e3-IPC_A [mm]
  rect 1.135x1.062 smd paste+0 mask+0: 1(-0.815,0) 2(0.815,0)
  silkscreen extent -0.75,-0.95 0.75,0.95, body extent -0.77,-0.43 0.77,0.43, height 0.5
FP-CRCW0603-e3-IPC_C [mm]
  rect 0.735x0.862 smd paste+0 mask+0: 1(-0.615,0) 2(0.615,0)
  silkscreen extent -0.75,-0.85 0.75,0.85, body extent -0.77,-0.43 0.77,0.43, height 0.5
FP-CRCW0603-e3-MFG [mm]
  rect 0.75x1 smd paste+0 mask+0: 1(-0.75,0) 2(0.75,0)
  silkscreen extent -0.8,-0.9 0.8,0.9, body extent -0.77,-0.43 0.77,0.43, height 0.5
FP-DRL0006A-MFG [mm]
  rrect33% 0.67x0.3 smd paste+0 mask+0: 1(-0.74,0.5) 2(-0.74,0) 3(-0.74,-0.5) 4(0.74,-0.5) 5(0.74,0) 6(0.74,0.5)
  silkscreen extent -1.9,-1.05 0.65,1.05, body extent -0.8,-0.8 0.8,0.8, height 0.6
FP-NS0016A-IPC_C [mm]
  rect 1.853x0.545 smd paste+0 mask+0: 1(-3.325,4.445)
  rrect100% 1.853x0.545 smd paste+0 mask+0: 2(-3.325,3.175) 3(-3.325,1.905) 4(-3.325,0.635) 5(-3.325,-0.635) 6(-3.325,-1.905) 7(-3.325,-3.175) 8(-3.325,-4.445) 9(3.325,-4.445) 10(3.325,-3.175) 11(3.325,-1.905) 12(3.325,-0.635) 13(3.325,0.635) 14(3.325,1.905) 15(3.325,3.175) 16(3.325,4.445)
  silkscreen extent -4.88,-5.1 1.9,5.1, body extent -3.9,-5.1 3.9,5.1, height 2
FP-PTS645SM43SMTR92LFS-MFG [mm]
  rect 1.55x1.3 smd paste+0 mask+0: 1(-3.975,2.25) 2(3.975,2.25) 3(-3.975,-2.25) 4(3.975,-2.25)
  silkscreen extent -5.52,-3 3,3, body extent -4.85,-3.1 4.85,3.1, height 0.25
FP-RC0603-0_55-IPC_C [mm]
  rect 0.659x0.812 smd paste+0 mask+0: 1(-0.677,0) 2(0.677,0)
  silkscreen extent -1.01,-0.85 1.01,0.85, body extent -0.8,-0.4 0.8,0.4, height 0.55
FP-RC0603-0_55-MFG [mm]
  rect 0.9x0.8 smd paste+0 mask+0: 1(-0.85,0) 2(0.85,0)
  silkscreen extent -0.03,-0.45 0.03,0.45, body extent -0.8,-0.4 0.8,0.4, height 0.55
GS2011AG-G [mm]
  rect 0.9x2.8 smd: 1(-2.88,-5) 2(-1.44,-5) 4(1.44,-5) 5(2.88,-5) 6(2.88,5) 7(1.44,5) 9(-1.44,5) 10(-2.88,5) A(0,-5) A(0,5)
  silkscreen extent -3.45,-7.13 3.45,5, body extent -3.45,-5 3.45,5, height 3
GS4011AG-G [mm] "SMD,19x9.3mm LED Segment Displays ROHS, Alphanummerical"
  rect 1.2x2.5 smd: 1(-3.8,-9.5) 2(-1.9,-9.5) 3(0,-9.5) 4(1.9,-9.5) 5(3.8,-9.5) 12(3.8,9.5) 13(1.9,9.5) 14(0,9.5) 15(-1.9,9.5) 16(-3.8,9.5)
  rect 1.3x1.3 smd: 6(2.6,-7.1) 7(0,-7.1) 8(-2.6,-7.1) 9(-2.6,7.1) 10(0,7.1) 11(2.6,7.1)
  silkscreen extent -4.65,-11.63 4.65,9.5, body extent -4.65,-9.5 4.65,9.5, height 3.75
GS8011AR-G [mm]
  rect 2x4 smd: 1(-5.08,-13) 2(-2.54,-13) 4(2.54,-13) 5(5.08,-13) 6(5.08,13) 7(2.54,13) 9(-2.54,13) 10(-5.08,13) A(0,-13) A(0,13)
  silkscreen extent -8.4,-15.88 8.4,14, body extent -8.38,-13.97 8.38,13.97, height 3.75
HARWIN_M20-8770442R [mm]
  rect 1x2.51 smd: 1(-3.81,1.655) 2(-1.27,-1.655) 3(1.27,1.655) 4(3.81,-1.655)
  silkscreen extent -5.18,-1.25 5.08,2.76
IHLP5050CEER1R5M01 [mm]
  rect 3.175x4.95 smd: 1(-5.715,0) 2(5.715,0)
  silkscreen extent -6.6,-6.45 6.6,6.45, body extent -6.66,-6.38 6.6,6.38, height 7.29
LED_WS2812B-4020 [mm]
  rect 0.42x1.3 smd: 1(1.275,-0.85) 2(0.425,-0.85) 3(-0.425,-0.85) 4(-1.275,-0.85)
  silkscreen extent -1.99,-2.2 1.99,0.85, body extent -1.99,-1 1.99,1, height 1.73
ONSC-SC-75-3-463-01_V [mil] "SOT23, 3-Leads, Body 1.6x0.8mm, Pitch 0.5mm"
  rect 20x14.02 smd: 1(-25.49,19.69) 2(-25.49,-19.69) 3(25.49,0)
  silkscreen extent -27,-31 16,44, body extent -16,-31 16,31, height 35
ONSC-SOT-23-3-318-08_V [mm] "SOT23, 3-Leads, Body 2.92x1.3mm, Pitch 0.95mm"
  rect 0.9x0.8 smd: 1(-1,0.95) 2(-1,-0.95) 3(1,0)
  silkscreen extent -1.13,-1.46 0.65,2.02, body extent -0.65,-1.46 0.65,1.46, height 1.11
Passermarke-Footprint-1 [mm]
  Top Layer circle w0.5: c0,0 r0.25
  silkscreen extent -1,-1 1,1
PTH-M4D7X7-Footprint-1 [mm]
  round 7 hole 3.3: 1(0,0)
PW0020A_M [mm] "SOP, 20-Leads, Body 6.6x4.5mm, Pitch 0.65mm, IPC Low Density"
  rrect22% 1.6x0.45 smd: 1(-3.05,2.925) 2(-3.05,2.275) 3(-3.05,1.625) 4(-3.05,0.975) 5(-3.05,0.325) 6(-3.05,-0.325) 7(-3.05,-0.975) 8(-3.05,-1.625) 9(-3.05,-2.275) 10(-3.05,-2.925) 11(3.05,-2.925) 12(3.05,-2.275) 13(3.05,-1.625) 14(3.05,-0.975) 15(3.05,-0.325) 16(3.05,0.325) 17(3.05,0.975) 18(3.05,1.625) 19(3.05,2.275) 20(3.05,2.925)
  silkscreen extent -3.17,-3.3 1.85,3.82, body extent -3.21,-3.25 3.21,3.25, height 1
RESC1608X55X25ML10T15 [mm] "Chip Resistor, 2-Leads, Body 1.60x0.80mm, IPC Low Density"
  rect 0.8x1 smd: 1(-0.75,0) 2(0.75,0)
  body extent -0.85,-0.45 0.85,0.45, height 0.55
RESC1608X55X30NL15T15 [mm] "Chip Resistor, 2-Leads, Body 1.60x0.80mm, IPC Medium Density"
  rect 0.8x0.95 smd: 1(-0.675,0) 2(0.675,0)
  body extent -0.87,-0.48 0.87,0.48, height 0.55
RESC1609X50X30NL10T20 [mm] "Chip Resistor, 2-Leads, Body 1.55x0.85mm, IPC Medium Density"
  rect 0.8x0.95 smd: 1(-0.625,0) 2(0.625,0)
  body extent -0.82,-0.48 0.82,0.48, height 0.5
SMTC-HTSS-105-01-X-DV [mm] "High Temp Top Shroud, 2x5 Pins, Vertical, 2.54mm Pitch, Male"
  rect 1.27x5.08 smd: 1(-5.08,-3.43) 2(-5.08,3.43) 3(-2.54,-3.43) 4(-2.54,3.43) 5(0,-3.43) 6(0,3.43) 7(2.54,-3.43) 8(2.54,3.43) 9(5.08,-3.43) 10(5.08,3.43)
  silkscreen extent -8.25,-6.64 8.25,4.63, body extent -8.25,-5.59 8.26,5.59, height 10.16
SSOP-SS28_N [mm] "SOP, 28-Leads, Body 10.2x5.2mm, Pitch 0.65mm, IPC Medium Density"
  oval 2.1x0.45 smd: 1(-3.45,4.225) 2(-3.45,3.575) 3(-3.45,2.925) 4(-3.45,2.275) 5(-3.45,1.625) 6(-3.45,0.975) 7(-3.45,0.325) 8(-3.45,-0.325) 9(-3.45,-0.975) 10(-3.45,-1.625) 11(-3.45,-2.275) 12(-3.45,-2.925) 13(-3.45,-3.575) 14(-3.45,-4.225) 15(3.45,-4.225) 16(3.45,-3.575) 17(3.45,-2.925) 18(3.45,-2.275) 19(3.45,-1.625) 20(3.45,-0.975) 21(3.45,-0.325) 22(3.45,0.325) 23(3.45,0.975) 24(3.45,1.625) 25(3.45,2.275) 26(3.45,2.925) 27(3.45,3.575) 28(3.45,4.225)
  silkscreen extent -3.57,-5.25 2,5.25, body extent -2.8,-5.25 2.8,5.25, height 2
TECO-5-146130-2_V [mm] "Header, 6-Leads, Body 7.21x4.88mm, Pitch 2.54mm"
  rect 1.27x3.56 smd: 1(-2.54,-2.605) 2(-2.54,2.605) 3(0,-2.605) 4(0,2.605) 5(2.54,-2.605) 6(2.54,2.605)
  silkscreen extent -3.6,-5.06 3.6,2.44, body extent -3.61,-3.77 3.61,3.64, height 9.74
TPS51386 [mm]
  rrect50% 1.4x0.25 smd: 1(-0.5,0.5) 2(-0.5,-0.5) 7(0.5,0)
  rrect50% 0.25x0.6 smd: 3(-0.75,-1.4) 4(-0.25,-1.4) 5(0.25,-1.4) 6(0.75,-1.4) 9(0.75,1.4) 10(0.25,1.4) 11(-0.25,1.4) 12(-0.75,1.4)
  rrect50% 0.6x0.25 smd: 8(0.9,0.5)
  silkscreen extent -1.54,-1.5 1,1.5, body extent -1,-1.5 1,1.5, height 1
TYPEC-300D-BCP16H100-Footprint-1 [mm]
  round 0.7 hole 0.4: A1(-3.5,0.83) A4(-2.5,0.83) A5(-1.5,0.83) A6(-0.5,0.83) A7(0.5,0.83) A8(1.5,0.83) A9(2.5,0.83) A12(3.5,0.83) B1(3.5,-0.82) B4(2.5,-0.82) B5(1.5,-0.82) B6(0.5,-0.82) B7(-0.5,-0.82) B8(-1.5,-0.82) B9(-2.5,-0.82) B12(-3.5,-0.82)
  round 0.9 hole 0.9 unplated: M(-5.4,0) M(5.4,0)
  oval 1.4x1 hole 0.6 slot 1 at 0 deg: M_GND(-4.225,-2.02) M_GND(-4.225,2.02) M_GND(4.225,-2.02) M_GND(4.225,2.02)

## Part data
C900: library part CMP-2006-02924-1, Manufacturer=Murata, Part Number=GRM188R71H472KA01D
C901 C902 C903: library part CMP-2100-03643-1, "Chip Capacitor, 0.1 uF, +/- 10%, 50 V, -55 to 125 degC, 0603 (1608 Metric), RoHS, Tape and Reel", Capacitance=100nF, Case Code (Imperial)=0603, Case Code (Metric)=1608, Dielectric=X7R, Dielectric Material=Ceramic, Insulation Resistance=10GR, Manufacturer=Murata, Max Operating Temperature=125degC, Min Operating Temperature=-55degC, Package Description="2-Pin Surface Mount Device, Body 1.6 x 0.8 mm", Package Quantity=1, Tolerance=10%, Voltage=50V, Case/Package=0603, Contact Plating=Tin, Datasheet URL=http://psearch.en.murata.com/capacitor/product/GRM188R71H104KA93%23.pdf, Datasheet Version=42675.0, Depth=0.8mm, Height=0.8mm, Lead Free=LeadFree, Length=1.6mm, Manufacturer URL=http://www.murata.com/, Material=Ceramic, Mount=SurfaceMount, Number of Pins=2, Package Reference=0603, Packaging=TapeandReel, Radiation Hardening=No, REACH SVHC=NoSVHC, RoHSCompliant=true, Termination=SMD/SMT, Thickness=0.035inch, Voltage Rating=50V, Voltage Rating (DC)=50V, Width=0.8mm
C904 C905: library part CMP-2000-04945-1, "Chip Capacitor, 22 pF, +/- 5%, 50 V, -55 to 125 degC, 0603 (1608 Metric), RoHS, Tape and Reel", Capacitance=22pF, Case Size/Dimension=0603, Dielectric=C0G, Manufacturer=Murata, Package Description="2-Pin Surface Mount Device, Body 1.6 x 0.8 mm", Package Reference=603, Rated Voltage=50V, Tolerance (%)=±5%, Datasheet URL=https://datasheet.ciiva.com/11786/0900766b807a1cab-11786398.pdf, Datasheet Version=Jul-06, Manufacturer URL=http://www.murata.com/
C1001 C1002 C1003 C1021 C1022 C1023: library part CMP-2000-05397-3, "Multilayer Ceramic Capacitors 47uF ±20% 25V X5R SMD 1206 / C3216X5R1E476M160AC", Capacitance=47uF, Case Code (Imperial)=1206, Case Code (Metric)=3216, Dielectric=X5R, Dielectric Material=Ceramic, Max Operating Temperature=85°C, Min Operating Temperature=-55°C, Package Quantity=1, Tolerance=20%, Voltage=25V, Case/Package=1206, Depth=1.6mm, Height=1.6mm, Lead Free="Lead Free", Length=0.126inch, Mount="Surface Mount", Packaging="Tape and Reel", REACH SVHC="No SVHC", Resistor Type=Ceramic, RoHS Compliant=Yes, Series=C, Termination=SMD/SMT, Thickness=0.071inch, Voltage Rating=25V, Voltage Rating (DC)=25V, Weight=0.000571oz, Width=0.063inch
C1004 C1006 C1024 C1026: library part CMP-2100-03644-1, "Chip Capacitor, 0.1 uF, +/- 10%, 50 V, -55 to 125 degC, 0805 (2012 Metric), RoHS, Tape and Reel / GRM21BR71H104KA01L", Capacitance=100nF, Case Code (Imperial)=0805, Case Code (Metric)=2012, Dielectric=X7R, Dielectric Material=Ceramic, Insulation Resistance=10GR, Manufacturer=Murata, Max Operating Temperature=125degC, Min Operating Temperature=-55degC, Package Description="2-Pin Surface Mount Device, Body 2 x 1.25 mm", Package Quantity=1, Tolerance=10%, Voltage=50V, Case/Package=0805, Datasheet URL=http://psearch.en.murata.com/capacitor/product/GRM21BR71H104KA01%23.pdf, Datasheet Version=42675.0, Depth=1.25mm, Height=1.25mm, Lead Free=LeadFree, Length=2mm, Manufacturer URL=http://www.murata.com/, Material=Ceramic, Mount=SurfaceMount, Number of Pins=2, Package Reference=0805, Packaging=TapeandReel, Radiation Hardening=No, REACH SVHC=Unknown, RoHSCompliant=true, Termination=SMD/SMT, Thickness=0.053inch, Voltage Rating=50V, Voltage Rating (DC)=50V, Width=0.049inch
C1005 C1025: library part CMP-2006-02243-2, "CAP CER 1UF 10V Y5V 0603 / C0603C105Z8VACTU", Capacitance=1uF, Case Code (Imperial)=0603, Case Code (Metric)=1608, Dielectric=Y5V, Dielectric Material=Ceramic, Max Operating Temperature=85°C, Min Operating Temperature=-30°C, Package Quantity=1, Tolerance=80%, Voltage Rating=10V, Case/Package=0603, Construction=Flat, Depth=0.8mm, Dissipation Factor=10%, Height=0.8mm, Lead Free="Lead Free", Lead Pitch=0.7mm, Length=1.6mm, Mount="Surface Mount", Packaging="Tape and Reel", Radiation Hardening=No, REACH SVHC="No SVHC", RoHS Compliant=Yes, Series=C, Termination=SMD/SMT, Thickness=0.035inch, Voltage Rating (DC)=10V, Width=0.8mm
C1007 C1027: library part CMP-2006-03465-2, "CAP CER 22PF 16V 10% NP0 0603 / C0603C220K4GACTU", Capacitance="22 pF", Manufacturer=KEMET, Manufacturer Part Number=C0603C220K4GACTU, Package=C0603C-CF, Temperature="-55°C to +125°C", Temperature Characteristic=C0G, Temperature Coefficient=30ppm/°C, Temperature Range High=+125°C, Temperature Range Low=-55°C, Tolerance=0.1, Voltage Rating="16 V", Automotive=Yes, Automotive Grade="Grade 1", Category=Cap, ComponentLink2Description=Datasheet, ComponentLink2URL=https://api.kemet.com/component-edge/download/datasheet/C0603C100J5GACAUTO.pdf, Device Class L1="Passive Components", Device Class L2=Capacitors, Device Class L3="Ceramic Capacitors", Digikey Description="CAP CER 22PF 16V 10% NP0 0603", Height=0.87mm, Lead Free=Yes, Material=Ceramic, Mouser Description="Multilayer Ceramic Capacitors MLCC - SMD/SMT 16volts 22pF C0G 10%", Octopart=https://octopart.com/c0603c220k4gactu-kemet-17097913, RoHS=TRUE
C1008 C1009 C1010 C1011 C1028 C1029 C1030 C1031: library part CMP-2000-05398-2, "Multilayer Ceramic Capacitors 22uF ±20% 35V X5R SMD 1206 / C3216X5R1V226M160AC", Capacitance=22uF, Case Code (Imperial)=1206, Case Code (Metric)=3216, Dielectric=X5R, Dielectric Material=Ceramic, Max Operating Temperature=85°C, Min Operating Temperature=-55°C, Package Quantity=2000, Tolerance=20%, Voltage=35V, Case/Package=1206, Construction=Flat, Depth=1.6mm, Height=1.6mm, Lead Free="Lead Free", Length=3.2mm, Mount="Surface Mount", Packaging="Tape and Reel", Radiation Hardening=No, REACH SVHC="No SVHC", Resistor Type=Ceramic, RoHS Compliant=Yes, Series=C, Termination=SMD/SMT, Thickness=1.6mm, Voltage Rating=35V, Voltage Rating (DC)=35V, Weight=0.000571oz, Width=0.063inch
C1100: library part CMP-14477-002194-3, "Ceramic Capacitor Automotive 0.1uF ±10% 35V X5R 0603", Capacitance=100nF, Case Code (Imperial)=0603, Case Code (Metric)=1608, Dielectric=X5R, Max Operating Temperature=85°C, Min Operating Temperature=-55°C, Ratings=AEC-Q200, Tolerance=10%, Voltage Rating=35V, Case/Package=0603, Halogen Free="Halogen Free", Height=900µm, Lead Free="Lead Free", Length=1.6002mm, Material=Ceramic, Max Length=1.7mm, Max Thickness=900µm, Max Width=900µm, Min Length=1.5mm, Min Thickness=700µm, Min Width=700µm, Mount="Surface Mount", NexarPartId=29103042, Packaging=Digi-Reel®, RoHS=Compliant, Termination=SMD/SMT, Thickness=889µm, Voltage Rating (DC)=35V, Width=800µm
C1101 C1102: library part CMP-08246-002551-1, "Cap Ceramic 1uF 35V X7R 10% Pad SMD 0603 +125°C Automotive T/R / CGA3E1X7R1V105K080AC", Case Code (Imperial)=0603, Case Code (Metric)=1608, Dielectric=X7R, Max Operating Temperature=125°C, Min Operating Temperature=-55°C, Package Quantity=4000, Ratings=AEC-Q200, Tolerance=10%, Voltage Rating=35V, Capacitance=1uF, Case/Package=0603, Height=0.8mm, Length=0.063inch, Mount="Surface Mount", Packaging="Tape and Reel", Termination=SMD/SMT, Thickness=0.035inch, Voltage Rating (DC)=35V, Weight=7.1E-05oz, Width=0.031inch
C1103: library part CMP-001-00081-4, "Chip Capacitor, 22µF +/-40%, 16V, 0805, Thickness 1.45 mm", Case/Package=0805, Max Operating Temperature=85°C, Min Operating Temperature=-55°C, Tolerance=5%, Voltage Rating=16V, Mounting Technology=SMT, Pins=2
D100 D101 D102: library part GS8011AR-G, "SMD, 28x16.8mm 7-Segment"
D110: library part GS4011AG-G, "SMD, 19x9.3mm 14-Segment, Alphanummerical"
D510 D511 D512 D513 D514 D515 D520 D521 D522 D523: library part GS2011AG-G, "SMD, 10x6.9mm 7-Segment"
D900: library part CMP-00278-29932846-1, "ESDONCAN1LT3G ESD Suppressor TVS Dual Bi-Dir 3-Pin SOT-23 T/R - Tape and Reel", Case/Package=TO-236-3, Clamping Voltage=50V, Manufacturer Lifecycle Status=ACTIVE, Max Operating Temperature=150°C, Min Breakdown Voltage=26.2V, Min Operating Temperature=-55°C, Peak Pulse Current=3A, Power Line Protection=No, Reverse Standoff Voltage=24V, Composition=Zener, Lead Free="Lead Free", Lifecycle Status=Production, Mount="Surface Mount", NexarPartId=29932846, Number of Bidirectional Channels=2, Number of Pins=3, Packaging="Tape & Reel (TR)", RoHS=Compliant
D1001 D1021: library part CMP-1060-00985-1, "Zener Voltage Regulator, 225 mW, 3-Pin SOT-23, Pb-Free, Tape and Reel", Manufacturer="On Semiconductor", ComponentLink1Description="Manufacturer URL", ComponentLink1URL=http://www.onsemi.com/, ComponentLink2Description=Datasheet, ComponentLink2URL=http://www.onsemi.cn/pub_link/Collateral/MMBZ5221BLT1-D.PDF, ComponentLink3Description="Package Specification", ComponentLink3URL=http://www.onsemi.cn/pub_link/Collateral/318-08.PDF, DatasheetVersion="Rev. 12", Mounting Technology="Surface Mount", PackageDescription="3-Pin Small Outline Transistor, Body 2.92 x 1.3 mm, Pitch 0.95 mm", PackageReference=SOT-23-3-318-08, PackageVersion="Rev. AP, 11/2009", Packing="Tape and Reel", PartNumber=MMBZ5231BLT1G, RoHS=Pb-Free, VZ Typ (V)=5.1
D1100: library part CMP-04985-000003-1, "TVS DIODE 5.5V 15V 6SOT", Ambient Temperature Range High=+125°C, Ambient Temperature Range Low=-40°C, Breakdown Voltage=7V, Clamping Voltage=15V, Manufacturer="Texas Instruments", Package=DRL0006A, Peak Pulse Current=2.5A, Peak Pulse Power=35W, Reverse Standoff Voltage=5.5V, Temperature="-40°C to +125°C", Automotive=No, Category=Diode, ComponentLink2Description=Datasheet, ComponentLink2URL=http://www.ti.com/lit/ds/symlink/tpd2e1b06.pdf, Device Class L1="Circuit Protection", Device Class L2="ESD and Circuit Protection ICs", Device Class L3=unset, Digikey Description="TVS DIODE 5.5V 15V 6SOT", Direction=Bidirectional, Height=0.6mm, Interface=I2C,USB,LVDS,Other, Lead Free=Yes, Manufacturer Part Number=TPD2E1B06DRLR, Mouser Description="ESD Suppressors / TVS Diodes 2-CH system level ESD protect device", Number of Channels=2, Octopart=https://octopart.com/tpd2e1b06drlr-texas+instruments-30488860, RoHS=TRUE, Standoff Height=0mm, Temperature Range High=+125°C, Temperature Range Low=-40°C
D1101 D1102 D1103 D1104: library part CMP-1055-00426-2, "DIODE SCHOTTKY 20V 500MA SOD123", Average Rectified Current=500mA, Case/Package=SOD-123-2, Forward Voltage=385mV, Max Forward Surge Current (Ifsm)=5.5A, Max Operating Temperature=125°C, Max Repetitive Reverse Voltage (Vrrm)=20V, Min Operating Temperature=-65°C, Package Quantity=3000, Peak Reverse Current=250uA, Element Configuration=Single, Forward Current=500mA, Halogen Free="Halogen Free", Height=1.17mm, Lead Free="Lead Free", Length=2.69mm, Max Reverse Voltage (DC)=20V, Number of Pins=2, Packaging="Tape and Reel", Peak Non-Repetitive Surge Current=5.5A, Reverse Voltage (DC)=20V, Termination=SMD/SMT, Weight=0.000363oz, Width=1.6mm
J800 J801: library part CTB9302-9, "CTB9302/9 - Stiftleiste - 9-pol, RM 5 mm, 0°"
J900: library part CTB9302-2, "CTB9302/2 - Stiftleiste - 2-pol, RM 5 mm, 0°"
L900: library part CMP-08256-000007-1, "CMC 100UH 150MA 2LN SMD AEC-Q200", Impedance At Frequency="5800Ω @ 10MHz", Inductance=100uH, Manufacturer=TDK, Package=ACT45B, Rms Current=0.15A, Series Resistance=2Ω, Temperature="-40°C to +150°C", Temperature Range High=+150°C, Temperature Range Low=-40°C, Test Frequency=100kHz, Tolerance=+50/-30%, Automotive=Yes, Automotive Grade="Grade 0", Category=Ind, ComponentLink2Description=Datasheet, ComponentLink2URL=https://product.tdk.com/info/en/catalog/datasheets/cmf_automotive_signal_act45b_en.pdf, Composition=Wirewound, Device Class L1="Passive Components", Device Class L2="EMI / RFI Components", Device Class L3="Common Mode Chokes", Digikey Description="CMC 100UH 150MA 2LN SMD AEC-Q200", Height=3mm, Lead Free=Yes, Manufacturer Part Number=ACT45B-101-2P-TL003, Mouser Description="Common Mode Chokes / Filters 5000ohms 100uH 150mA CAN-BUS AEC-Q200", Octopart=https://octopart.com/act45b-101-2p-tl003-tdk-11353565, RoHS=TRUE
L1001 L1021: "Chip Inductor, 1.5 uH, +/- 20% / IHLP5050CEER1R5M01"
M* M* M* M* M* M*: library part CMP-00001-2
P1100: library part CMP-002-00081-3, "Vertical USB Type C Connector"
P1101 P1103: library part CMP-1684-00011-1, "Male Header, Pitch 2.54 mm, 2 x 3 Position, Height 8.13 mm, -65 to 125 degC, RoHS, Tube", Max Operating Temperature="150 degC", Max Supply Voltage="5.5 V", Min Operating Temperature="-40 degC", Min Supply Voltage="4.5 V", Nominal Supply Voltage="5 V", Package Quantity=3000, ComponentLink1Description="Manufacturer URL", ComponentLink1URL=http://www.te.com/, ComponentLink2Description=Datasheet, ComponentLink2URL=http://www.te.com/commerce/DocumentDelivery/DDEController?Action=showdoc&DocId=Customer+Drawing%7F146130%7FM%7Fpdf%7FEnglish%7FENG_CD_146130_M.pdf%7F5-146130-2, DatasheetVersion=Oct-15, Mount="Surface Mount", PackageDescription="Male Header, Pitch 2.54 mm, 2 x 3 Position, Height 8.13 mm", PackageReference=5-146130-2, Packaging="Tape and Reel", Pins=3, Radiation Hardening=No, RoHSCompliant=true
P1102: "Connector Header Surface Mount 4 position 0.100 (2.54mm)", Package=None, Availability="In Stock", Check_prices=https://www.snapeda.com/parts/M20-8770442R/Harwin+Inc./view-part/?ref=eda, MF="Harwin Inc.", MP=M20-8770442R, Price=None, Purchase-URL=https://pricing.snapeda.com/search?q=M20-8770442R&ref=eda, SnapEDA_Link=https://www.snapeda.com/parts/M20-8770442R/Harwin+Inc./view-part/?ref=snap
P1104: library part CMP-1024-00042-1, "Shrouded .025\" SQ Post Header, Surface Mount, Vertical, -55 to 125 degC, 2.54 mm Pitch, 10-Pin, Male, RoHS", Manufacturer=Samtec, Temperature Range="-55 to 125 degC", ComponentLink1Description="Manufacturer URL", ComponentLink1URL=http://www.samtec.com, ComponentLink2Description=Datasheet, ComponentLink2URL=http://www.samtec.com/documents/webfiles/pdf/htss.pdf, ComponentLink3Description="Package Specification", ComponentLink3URL=http://www.samtec.com/documents/webfiles/cpdf/HTSS-1XX-01-XX-DV-X-XX-X-XX-MKT.pdf, DatasheetVersion=F-214, Mounting Technology="Surface Mount", Orientation=Vertical, PackageDescription="High Temp Top Shroud", PackageReference=HTSS-105-01-X-DV, PackageVersion="Z, 7/2001", PartNumber=HTSS-105-01-L-DV, Pitch="2.54 mm", RoHS=True
PTH1 PTH2 PTH3 PTH4 PTH5 PTH6 PTH7 PTH8: library part CMP-00028-00009-2, "Mounting hole M4"
Q1103 Q1104: library part CMP-0630-00201-1, "Digital Transistor (BRT), R1=2.2 kOhm, R2=47 kOhm, NPN Transistor, 3-Pin SC-75, Pb-Free, Tape and Reel", Manufacturer="On Semiconductor", ComponentLink1Description="Manufacturer URL", ComponentLink1URL=http://www.onsemi.com/, ComponentLink2Description=Datasheet, ComponentLink2URL=http://www.onsemi.cn/pub_link/Collateral/DTC123J-D.PDF, ComponentLink3Description="Package Specification", ComponentLink3URL=http://www.onsemi.com/pub_link/Collateral/463-01.PDF, DatasheetVersion="Rev. 1", hFE Min=80, IC Continuous (A)=0.1, Mounting Technology="Surface Mount", PackageDescription="3-Pin Small Outline Transistor, Body 1.6 x 0.8 mm, Pitch 0.5 mm", PackageReference=SC-75-3-463-01, PackageVersion="Rev. F, 07/2005", Packing="Tape and Reel", PartNumber=DTC123JET1G, Polarity=NPN, R1/R2 Typ=0.047, RoHS=TRUE, V(BR)CEO Min (V)=50